# EAGLE board AMS Test Board rev1 (EAGLE 9.6.2)
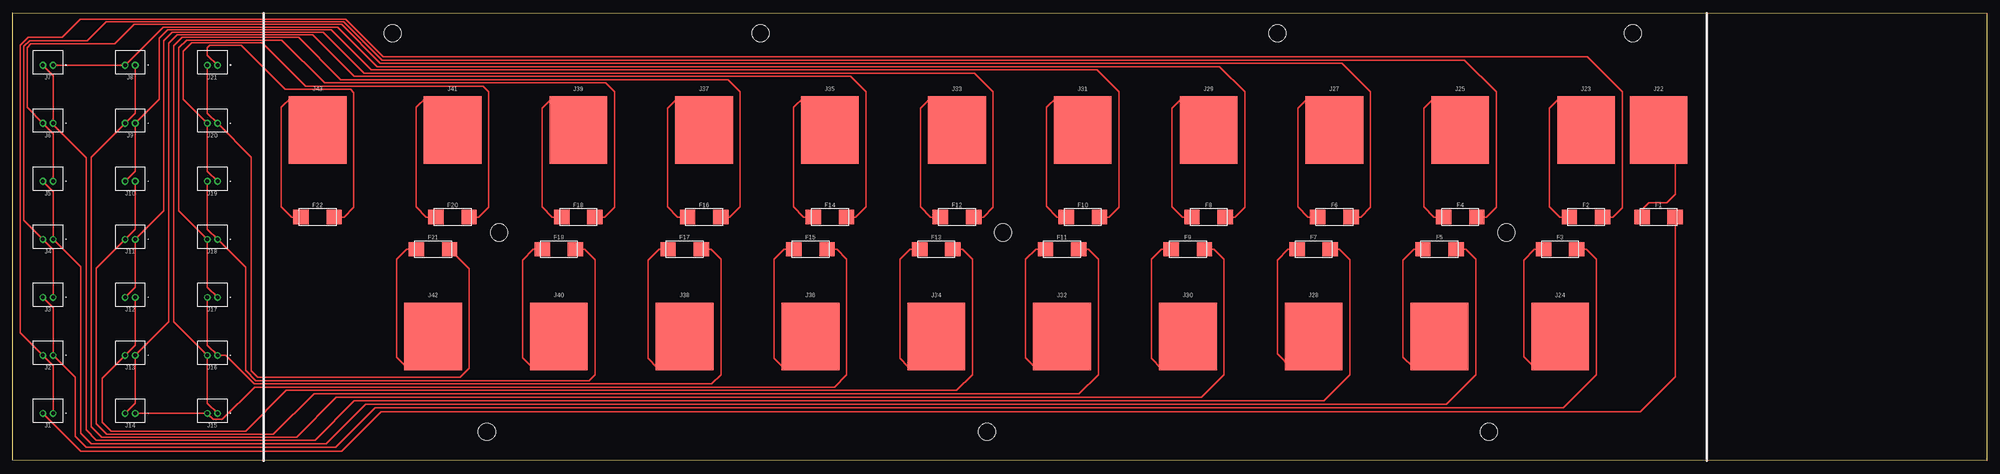
[diagram p0: board, top side]

Size 386.61 x 87.73 mm. Coordinates in mm from the lower left corner, seen from the top.
Outline: 0,0.1 0,87.73 386.61,87.63 386.61,0 0,0.1
Copper layers (1*16): Top 0.035mm / dielectric 1.5mm / Bottom 0.035mm
Design rules "default": minimum track width 6mil, minimum drill 0.35mm, track to track 6mil, track to pad 6mil, pad to pad 6mil, via to via 6mil, smd to smd 6mil, copper to edge 40mil, drill to drill 6mil, minimum pad ring 10mil, minimum via ring 8mil, stop-mask expansion 4mil, vias tented up to drill 0mil, thermal gap 10mil

## Footprints (pad centres in the part's own frame; a part is rotated, then mirrored left to right if it is on the bottom)
OMF_125 = smd 3 x 2.8: 1 -3.25,0; 2 3.25,0
B2B-PH-K = drill 0.8: 1 -1,0.55; 2 1,0.55
5222 = smd 11.303 x 13.208: 1 0,0
MOUNTING_M3 = hole 3.4: 0,0

## Placement (x,y rotation side)
F1  FUSE_OMF_125_.5A  [OMF_125]  322.35,47.73 0 top
F2  FUSE_OMF_125_.5A  [OMF_125]  308.13,47.73 0 top
F3  FUSE_OMF_125_.5A  [OMF_125]  303.05,41.43 0 top
F4  FUSE_OMF_125_.5A  [OMF_125]  283.49,47.73 0 top
F5  FUSE_OMF_125_.5A  [OMF_125]  279.43,41.43 0 top
F6  FUSE_OMF_125_.5A  [OMF_125]  258.85,47.73 0 top
F7  FUSE_OMF_125_.5A  [OMF_125]  254.79,41.43 0 top
F8  FUSE_OMF_125_.5A  [OMF_125]  234.21,47.73 0 top
F9  FUSE_OMF_125_.5A  [OMF_125]  230.15,41.43 0 top
F10  FUSE_OMF_125_.5A  [OMF_125]  209.58,47.73 0 top
F11  FUSE_OMF_125_.5A  [OMF_125]  205.51,41.43 0 top
F12  FUSE_OMF_125_.5A  [OMF_125]  184.94,47.73 0 top
F13  FUSE_OMF_125_.5A  [OMF_125]  180.87,41.43 0 top
F14  FUSE_OMF_125_.5A  [OMF_125]  160.05,47.73 0 top
F15  FUSE_OMF_125_.5A  [OMF_125]  156.24,41.43 0 top
F16  FUSE_OMF_125_.5A  [OMF_125]  135.41,47.73 0 top
F17  FUSE_OMF_125_.5A  [OMF_125]  131.6,41.43 0 top
F18  FUSE_OMF_125_.5A  [OMF_125]  110.77,47.73 0 top
F19  FUSE_OMF_125_.5A  [OMF_125]  106.96,41.43 0 top
F20  FUSE_OMF_125_.5A  [OMF_125]  86.13,47.73 0 top
F21  FUSE_OMF_125_.5A  [OMF_125]  82.32,41.43 0 top
F22  FUSE_OMF_125_.5A  [OMF_125]  59.72,47.73 0 top
J1  CONNECTOR-2__B2B-PH-K  [B2B-PH-K]  6.9,9.84 180 top
J2  CONNECTOR-2__B2B-PH-K  [B2B-PH-K]  6.9,21.2 180 top
J3  CONNECTOR-2__B2B-PH-K  [B2B-PH-K]  6.9,32.56 180 top
J4  CONNECTOR-2__B2B-PH-K  [B2B-PH-K]  6.9,43.92 180 top
J5  CONNECTOR-2__B2B-PH-K  [B2B-PH-K]  6.9,55.28 180 top
J6  CONNECTOR-2__B2B-PH-K  [B2B-PH-K]  6.9,66.64 180 top
J7  CONNECTOR-2__B2B-PH-K  [B2B-PH-K]  6.9,78 180 top
J8  CONNECTOR-2__B2B-PH-K  [B2B-PH-K]  23,78 180 top
J9  CONNECTOR-2__B2B-PH-K  [B2B-PH-K]  23,66.64 180 top
J10  CONNECTOR-2__B2B-PH-K  [B2B-PH-K]  23,55.28 180 top
J11  CONNECTOR-2__B2B-PH-K  [B2B-PH-K]  23,43.92 180 top
J12  CONNECTOR-2__B2B-PH-K  [B2B-PH-K]  23,32.56 180 top
J13  CONNECTOR-2__B2B-PH-K  [B2B-PH-K]  23,21.2 180 top
J14  CONNECTOR-2__B2B-PH-K  [B2B-PH-K]  23,9.84 180 top
J15  CONNECTOR-2__B2B-PH-K  [B2B-PH-K]  39.1,9.84 180 top
J16  CONNECTOR-2__B2B-PH-K  [B2B-PH-K]  39.1,21.2 180 top
J17  CONNECTOR-2__B2B-PH-K  [B2B-PH-K]  39.1,32.56 180 top
J18  CONNECTOR-2__B2B-PH-K  [B2B-PH-K]  39.1,43.92 180 top
J19  CONNECTOR-2__B2B-PH-K  [B2B-PH-K]  39.1,55.28 180 top
J20  CONNECTOR-2__B2B-PH-K  [B2B-PH-K]  39.1,66.64 180 top
J21  CONNECTOR-2__B2B-PH-K  [B2B-PH-K]  39.1,78 180 top
J22  CONNECTOR-1_5222  [5222]  322.35,64.77 0 top
J23  CONNECTOR-1_5222  [5222]  308.13,64.77 0 top
J24  CONNECTOR-1_5222  [5222]  303.05,24.38 0 top
J25  CONNECTOR-1_5222  [5222]  283.49,64.77 0 top
J26  CONNECTOR-1_5222  [5222]  279.43,24.38 0 top
J27  CONNECTOR-1_5222  [5222]  258.85,64.77 0 top
J28  CONNECTOR-1_5222  [5222]  254.79,24.38 0 top
J29  CONNECTOR-1_5222  [5222]  234.21,64.77 0 top
J30  CONNECTOR-1_5222  [5222]  230.15,24.38 0 top
J31  CONNECTOR-1_5222  [5222]  209.58,64.77 0 top
J32  CONNECTOR-1_5222  [5222]  205.51,24.38 0 top
J33  CONNECTOR-1_5222  [5222]  184.94,64.77 0 top
J34  CONNECTOR-1_5222  [5222]  180.87,24.38 0 top
J35  CONNECTOR-1_5222  [5222]  160.05,64.77 0 top
J36  CONNECTOR-1_5222  [5222]  156.24,24.38 0 top
J37  CONNECTOR-1_5222  [5222]  135.41,64.77 0 top
J38  CONNECTOR-1_5222  [5222]  131.6,24.38 0 top
J39  CONNECTOR-1_5222  [5222]  110.77,64.77 0 top
J40  CONNECTOR-1_5222  [5222]  106.96,24.38 0 top
J41  CONNECTOR-1_5222  [5222]  86.13,64.77 0 top
J42  CONNECTOR-1_5222  [5222]  82.32,24.38 0 top
J43  CONNECTOR-1_5222  [5222]  59.72,64.77 0 top
U$1  [MOUNTING_M3]  74.37,83.69 0 top
U$2  [MOUNTING_M3]  146.46,83.69 0 top
U$3  [MOUNTING_M3]  247.68,83.69 0 top
U$4  [MOUNTING_M3]  317.32,83.69 0 top
U$20  [MOUNTING_M3]  95.28,44.7 0 top
U$21  [MOUNTING_M3]  193.95,44.7 0 top
U$22  [MOUNTING_M3]  292.51,44.7 0 top
U$29  [MOUNTING_M3]  92.86,5.72 0 top
U$30  [MOUNTING_M3]  190.78,5.72 0 top
U$31  [MOUNTING_M3]  289.08,5.72 0 top

## Library data of the parts
F1-F22 = HyTechDevices; CURRENT: 500mA; DKPN: 486-3694-ND; FUSE_TYPE: SMD; I2T: 0.01; MANUFACTURER: Schurter Inc.; MOPN: 693-3404.0045.11; MPN: 3404.0045.11; VOLTAGE: 125V
J1-J21 = HyTechDevices; DKPN: 455-1704-ND; MANUFACTURER: JST Sales America Inc.; MPN: B2B-PH-K-S(LF)(SN); NWRKPN: 37K9940
J22-J43 = HyTechDevices; DKPN: 36-5222-ND; MANUFACTURER: Keystone Electronics; MODEL: SPRING; MOPN: 534-5222; MPN: 5222
U$1-U$4 U$20-U$22 U$29-U$31 = HyTechManufacturing

## Nets
1-: F1.2 J1.2
2-: F2.2 J1.1 J2.2
3-: F3.2 J2.1 J3.2
4-: F4.2 J3.1 J4.2
5-: F5.2 J4.1 J5.2
6-: F6.2 J5.1 J6.2
7-: F7.2 J6.1 J7.2
8-: F8.2 J7.1 J8.2
9-: F9.2 J8.1 J9.2
10-: F10.2 J9.1 J10.2
11-: F11.2 J10.1 J11.2
12-: F12.2 J11.1 J12.2
13-: F13.2 J12.1 J13.2
14-: F14.2 J13.1 J14.2
15-: F15.2 J14.1 J15.2
16-: F16.2 J15.1 J16.2
17-: F17.2 J16.1 J17.2
18-: F18.2 J17.1 J18.2
19-: F19.2 J18.1 J19.2
20-: F20.2 J19.1 J20.2
21+: F22.2 J21.1
21-: F21.2 J20.1 J21.2
N$1: F1.1 J22.1
N$2: F2.1 J23.1
N$3: F3.1 J24.1
N$4: F4.1 J25.1
N$5: F5.1 J26.1
N$6: F6.1 J27.1
N$7: F7.1 J28.1
N$8: F8.1 J29.1
N$9: F9.1 J30.1
N$10: F10.1 J31.1
N$11: F11.1 J32.1
N$12: F12.1 J33.1
N$13: F13.1 J34.1
N$14: F14.1 J35.1
N$15: F15.1 J36.1
N$16: F16.1 J37.1
N$17: F17.1 J38.1
N$18: F18.1 J39.1
N$19: F19.1 J40.1
N$20: F20.1 J41.1
N$21: F21.1 J42.1
N$22: F22.1 J43.1

## Tracks (layer width: path | path; a pad name or v marks a point on that pad's centre or on a via)
1-
  Top 0.254: J1.2 13.31,1.88 64.39,1.88 72.14,9.63 318.77,9.63 325.63,16.48 325.63,47.7 F1.2
2-
  Top 0.254: J1.1 7.9,18.65 J2.2 1.5,25.05 1.5,81.36 3.05,82.91 9.67,82.91 13.21,86.45 65.17,86.45 72.52,79.1 308.36,79.1 315.21,72.24 315.21,49.53 313.41,47.73 F2.2
3-
  Top 0.254: J3.2 7.9,30.01 J2.1 12.19,16.35 12.19,4.79 14.35,2.64 63.25,2.64 70.99,10.39 303.66,10.39 310.13,16.87 310.13,39.5 308.2,41.43 F3.2
4-
  Top 0.254: J3.1 7.9,41.37 J4.2 2.16,47.11 2.16,81.13 3.3,82.27 14.61,82.27 18.29,85.95 64.84,85.95 72.33,78.46 284.35,78.46 290.58,72.24 290.58,49.66 288.64,47.73 F4.2
5-
  Top 0.254: J5.2 7.9,52.73 J4.1 13.31,37.96 13.31,5.39 15.33,3.38 61.38,3.38 69.1,11.1 280.75,11.1 286.51,16.87 286.51,39.5 284.58,41.43 F5.2
6-
  Top 0.254: F6.2 264.01,47.73 265.94,49.66 265.94,72.24 260.32,77.85 71.98,77.85 64.39,85.45 23.75,85.45 19.94,81.64 3.56,81.64 2.79,80.87 2.79,69.19 J6.2 7.9,64.09 J5.1
7-
  Top 0.254: J7.2 7.9,75.45 J6.1 7.9,65.83 14.35,59.38 14.35,6.07 16.38,4.04 59.18,4.04 66.9,11.76 256.77,11.76 261.87,16.87 261.87,39.37 259.81,41.43 F7.2
8-
  Top 0.254: J7.1 J8.2 29.49,84.94 63.63,84.94 71.37,77.19 236.35,77.19 241.3,72.24 241.3,49.66 239.37,47.73 F8.2
9-
  Top 0.254: J8.1 24,68.09 J9.2 15.34,59.43 15.34,6.66 17.38,4.62 55.58,4.62 63.37,12.42 232.79,12.42 237.24,16.87 237.24,39.5 235.3,41.43 F9.2
10-
  Top 0.254: J10.2 24,56.73 J9.1 28.7,70.79 28.7,82.78 30.35,84.43 62.36,84.43 70.23,76.56 212.34,76.56 216.66,72.24 216.66,49.66 214.73,47.73 F10.2
11-
  Top 0.254: J10.1 24,45.37 J11.2 16.38,37.75 16.38,7.21 18.44,5.16 51.03,5.16 59,13.13 208.86,13.13 212.6,16.87 212.6,39.5 210.67,41.43 F11.2
12-
  Top 0.254: J12.2 24,34.01 J11.1 29.59,48.96 29.59,82.27 31.24,83.92 60.83,83.92 68.83,75.92 188.34,75.92 192.02,72.24 192.02,49.66 190.09,47.73 F12.2
13-
  Top 0.254: J12.1 24,22.65 J13.2 17.53,16.17 17.53,7.59 19.3,5.82 45.59,5.82 53.57,13.79 184.89,13.79 187.96,16.87 187.96,39.5 186.03,41.43 F13.2
14-
  Top 0.254: J14.2 24,11.29 J13.1 30.58,27.23 30.58,81.8 32.22,83.44 58.72,83.44 66.87,75.29 164.08,75.29 167.13,72.24 167.13,49.79 165.07,47.73 F14.2
15-
  Top 0.254: J14.1 J15.2 39.26,8.12 41.04,8.12 47.37,14.45 160.91,14.45 163.32,16.87 163.32,39.5 161.39,41.43 F15.2
16-
  Top 0.254: J15.1 38.1,11.29 J16.2 31.5,27.25 31.5,81.25 33.15,82.91 56.01,82.91 64.26,74.65 140.08,74.65 142.49,72.24 142.49,49.79 140.44,47.73 F16.2
17-
  Top 0.254: J17.2 38.1,22.65 J16.1 41.75,20.65 47.31,15.09 136.91,15.09 138.68,16.87 138.68,39.5 136.75,41.43 F17.2
18-
  Top 0.254: J17.1 38.1,34.01 J18.2 32.51,48.95 32.51,80.87 34.04,82.4 52.7,82.4 61.09,74.02 116.08,74.02 117.86,72.24 117.86,49.66 115.92,47.73 F18.2
19-
  Top 0.254: J19.2 38.1,45.37 J18.1 45.59,37.87 45.59,17.75 47.62,15.72 112.9,15.72 114.05,16.87 114.05,39.37 111.99,41.43 F19.2
20-
  Top 0.254: J19.1 38.1,56.73 J20.2 33.4,70.79 33.4,80.24 35.05,81.89 48.9,81.89 57.4,73.38 92.08,73.38 93.22,72.24 93.22,49.66 91.29,47.73 F20.2
21+
  Top 0.254: J21.1 38.1,79.45 38.1,80.87 38.61,81.38 44.7,81.38 53.34,72.75 66.17,72.75 66.8,72.11 66.8,49.66 64.87,47.73 F22.2
21-
  Top 0.254: J21.2 38.1,68.09 J20.1 46.74,59.45 46.74,17.63 48.01,16.36 87.63,16.36 89.41,18.14 89.41,37.59 F21.2
N$1
  Top 0.254: F1.1 319.1,49.2 320.42,50.52 323.98,50.52 325.63,52.17 325.63,61.82 322.68,64.77 J22.1
N$2
  Top 0.254: F2.1 302.97,47.73 300.99,49.71 300.99,69.06 303.15,71.22 306.07,71.22 308.61,68.68 308.61,67.41 307.34,66.14 307.34,65.56 J23.1
N$3
  Top 0.254: F3.1 298.02,41.43 295.91,39.32 295.91,20.42 298.2,18.14 301.24,18.14 303.53,20.42 303.53,23.9 J24.1
N$4
  Top 0.254: J25.1 283.4,64.68 283.21,64.87 283.21,69.95 281.94,71.22 278.51,71.22 276.35,69.06 276.35,49.71 278.33,47.73 F4.1
N$5
  Top 0.254: F5.1 274.4,41.43 272.29,39.32 272.29,20.29 274.19,18.39 277.37,18.39 279.4,20.42 279.4,24.36 J26.1
N$6
  Top 0.254: F6.1 253.7,47.73 251.71,49.71 251.71,69.06 253.87,71.22 256.54,71.22 259.08,68.68 259.08,65 J27.1
N$7
  Top 0.254: F7.1 249.76,41.43 247.65,39.32 247.65,20.93 250.44,18.14 251.71,18.14 255.27,21.69 255.27,23.9 J28.1
N$8
  Top 0.254: F8.1 229.06,47.73 227.08,49.71 227.08,69.06 229.24,71.22 232.41,71.22 233.68,69.95 233.68,65.3 J29.1
N$9
  Top 0.254: F9.1 224.99,41.43 223.01,39.44 223.01,20.04 224.92,18.14 228.85,18.14 230.15,19.43 J30.1
N$10
  Top 0.254: F10.1 204.55,47.73 202.44,49.84 202.44,69.19 204.47,71.22 205.74,71.22 207.01,69.95 207.01,67.34 J31.1
N$11
  Top 0.254: F11.1 200.36,41.43 198.37,39.44 198.37,20.17 200.28,18.26 203.58,18.26 205.74,20.42 205.74,24.16 J32.1
N$12
  Top 0.254: F12.1 179.78,47.73 177.8,49.71 177.8,69.06 179.96,71.22 182.88,71.22 185.42,68.68 185.42,64.87 185.04,64.87 J33.1
N$13
  Top 0.254: F13.1 175.72,41.43 173.74,39.44 173.74,20.04 175.39,18.39 178.31,18.39 180.87,20.95 J34.1
N$14
  Top 0.254: J35.1 160.02,64.74 160.02,68.68 157.48,71.22 154.94,71.22 152.91,69.19 152.91,49.71 154.89,47.73 F14.1
N$15
  Top 0.254: J36.1 156.46,24.16 156.21,23.9 156.21,20.42 154.18,18.39 150.75,18.39 149.1,20.04 149.1,39.44 151.08,41.43 F15.1
N$16
  Top 0.254: F16.1 130.25,47.73 128.27,49.71 128.27,69.06 130.43,71.22 133.35,71.22 135.89,68.68 135.89,65.25 J37.1
N$17
  Top 0.254: F17.1 126.57,41.43 124.46,39.32 124.46,20.04 126.24,18.26 127.38,18.26 131.6,22.48 J38.1
N$18
  Top 0.254: F18.1 105.61,47.73 103.63,49.71 103.63,69.06 105.79,71.22 107.95,71.22 110.49,68.68 110.49,64.87 110.68,64.68 J39.1
N$19
  Top 0.254: J40.1 106.83,24.38 106.83,20.57 104.65,18.39 101.6,18.39 99.82,20.17 99.82,39.32 101.93,41.43 F19.1
N$20
  Top 0.254: F20.1 80.98,47.73 78.99,49.71 78.99,69.19 81.03,71.22 83.82,71.22 85.09,69.95 85.09,66.14 85.09,65.81 J41.1 | J41.1 86.36,64.54 86.36,63.6 86.13,63.83 J41.1
N$21
  Top 0.254: F21.1 77.17,41.43 75.18,39.44 75.18,20.29 77.22,18.26 80.39,18.26 82.55,20.42 82.55,24.16 J42.1
N$22
  Top 0.152: 59.69,64.8 J43.1
  Top 0.254: F22.1 54.61,47.73 52.58,49.76 52.58,69.19 54.61,71.22 57.15,71.22 59.69,68.68 59.69,64.8